# Altium PCB EasyPay.PcbDoc (part 1 of 2)
Units mil, origin at the board's own origin, x right, y up, seen from the top; angles counter-clockwise.
Board outline 5100 x 8140 mil, 2 copper layers (Top Layer, Bottom Layer); 127 components, 95 nets, 472 pads, 94 vias.
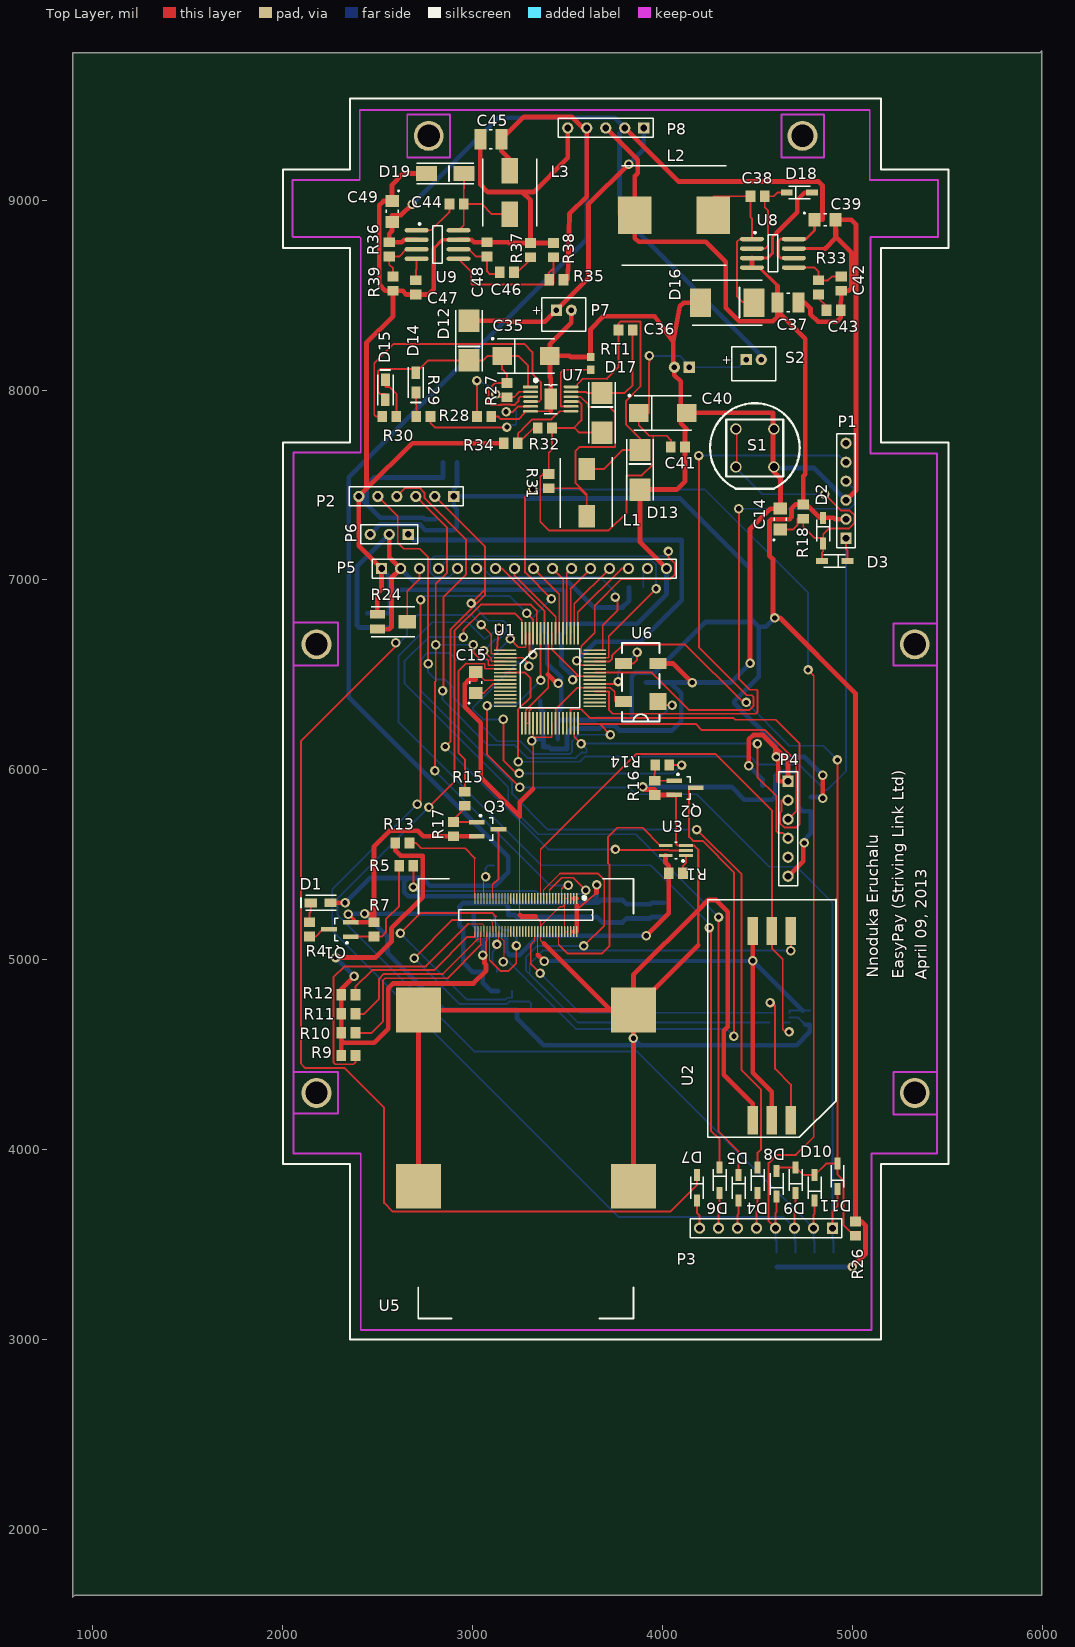
[diagram p0: Top Layer view]
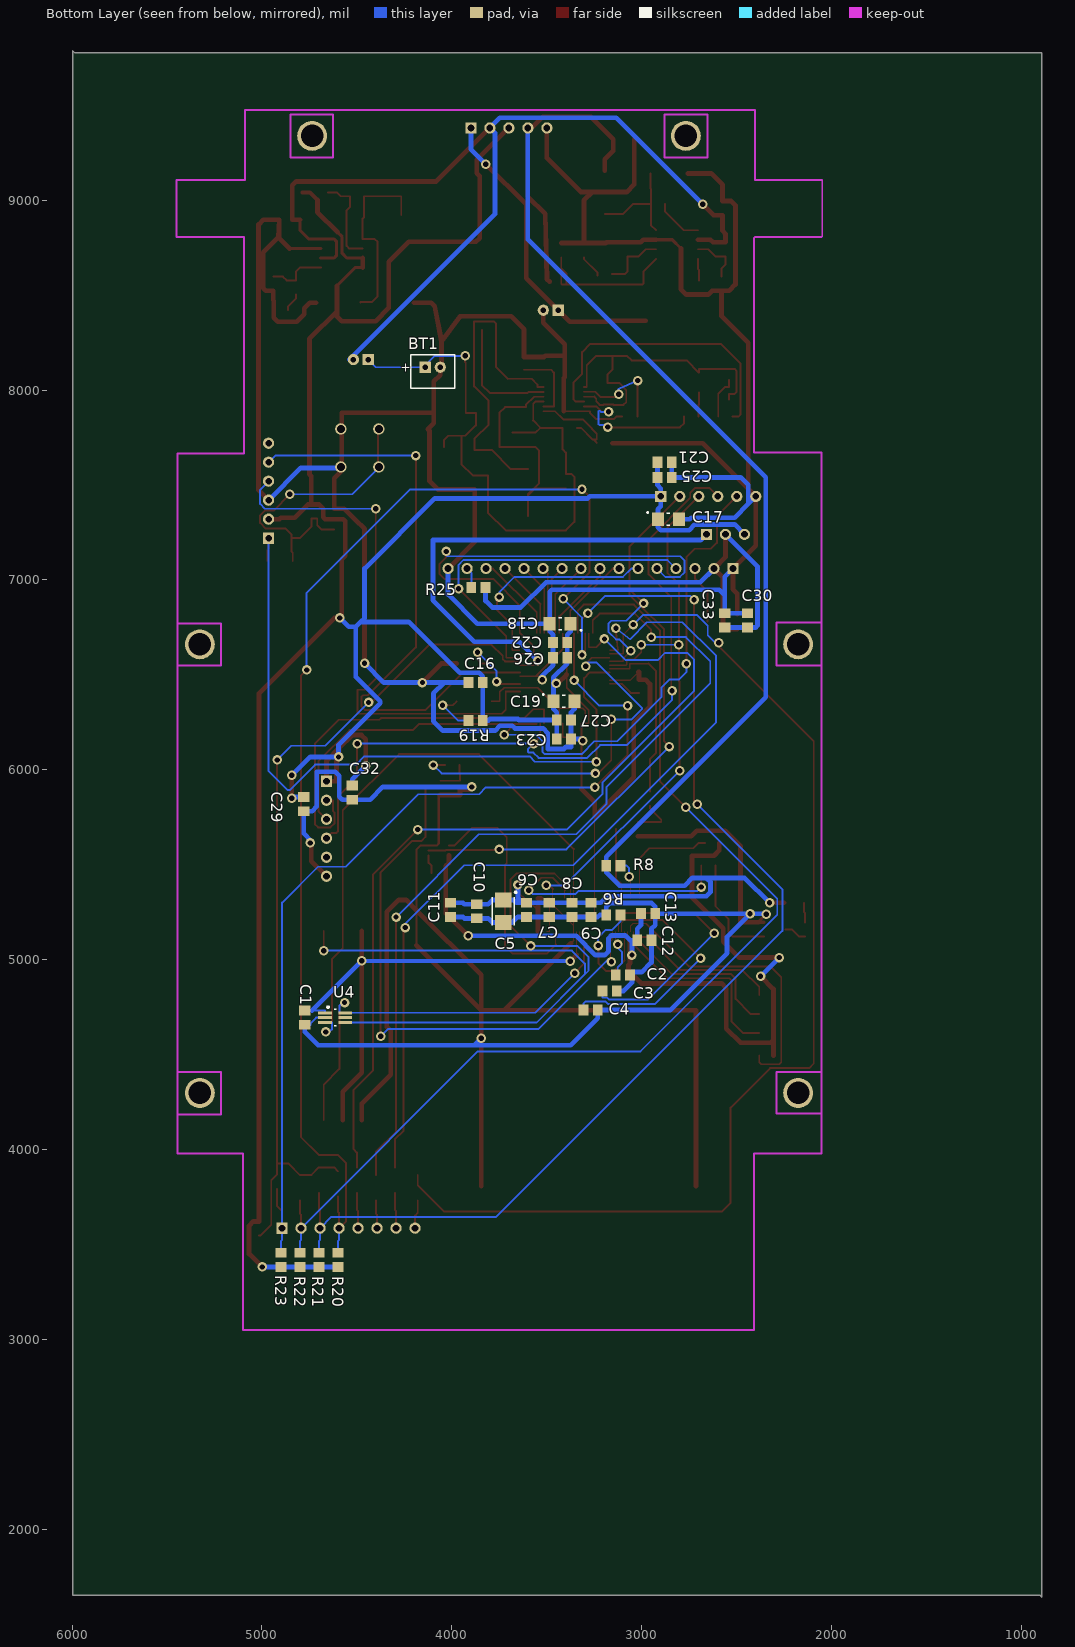
[diagram p1: Bottom Layer view, seen from below]

## Layer stack, top to bottom
Top Layer: signal copper 1.4
Dielectric: dielectric 12.6, FR-4, Dk 4.8
Bottom Layer: signal copper 1.4

## Board outline
895,9775 5985,9775 5995,9785 5995,1655 905,1655 895,1645

## Design rules (kind name [scope] priority, off if disabled: settings)
Clearance [All] p1: gap=8
HoleSize [All] p1: absolutevalues=TRUE maxlimit=120 minlimit=1 maxpercent=80.000 minpercent=20.000
MinimumSolderMaskSliver [All] p1: minsoldermaskwidth=0.1
PolygonConnect [All] p1: connectstyle=Relief reliefconductorwidth=10 reliefentries=4 polygonreliefangle="90 Angle"
RoomDefinition power [InComponentClass('power')] p1: confinementstyle=ConfineIn formatcopy=TRUE lockcomponents=FALSE outline 2482.01,7815.47 2482.01,7904.53 2486.06,7904.53 2486.06,8120 2515.47,8120 2515.47,8817.99 2524.57,8817.99 2524.57,9066.81 2686.46,9066.81 2686.46,9208.94 2993.39,9208.94 2993.39,9388.15 3436.06,9388.15 3436.06,9443.94 3963.94,9443.94 3963.94,9195.75 4370.27,9195.75 4370.27,9087.4 4833.43,9087.4 4833.43,8948.94 4956.1,8948.94 4956.1,8637.99 4984.53,8637.99 4984.53,8482.01 4977.99,8482.01 4977.99,8375.47 4609.45,8375.47 4609.45,8035.83 4285.91,8035.83 4285.91,7995.83 4192.17,7995.83 4192.17,7775.51 4157.99,7775.51 4157.99,7655.47 3963.94,7655.47 3963.94,7401.61 3748.94,7401.61 3748.94,7261.06 3446.06,7261.06 3446.06,7442.01 3355.47,7442.01 3355.47,7675.47 3122.01,7675.47 3122.01,7815.47
RoomDefinition peripherals [InComponentClass('peripherals')] p2: confinementstyle=ConfineIn formatcopy=TRUE lockcomponents=FALSE outline 2396.06,7176.06 2396.06,7303.94 2723.94,7303.94 2723.94,7123.94 4083.94,7123.94 4723.94,7123.94 4723.94,6003.94 4723.94,5897.99 4824.53,5897.99 4824.53,3973.43 4967.4,3973.43 4967.4,3662.99 5059.53,3662.99 5059.53,3507.01 4944.53,3507.01 4944.53,3342.01 4555.47,3342.01 4555.47,3523.07 4130,3523.07 4130,6686.06 2442.95,6686.06 2442.95,6709.02 2399.41,6709.02 2399.41,7176.06
RoomDefinition mcu [InComponentClass('mcu')] p3: confinementstyle=ConfineIn formatcopy=TRUE lockcomponents=FALSE outline 2336.06,7376.06 2336.06,7503.94 2802.01,7503.94 2802.01,7664.53 4233.15,7664.53 4233.15,7946.85 4736.85,7946.85 4736.85,7783.94 5028.94,7783.94 5028.94,7156.06 5018.43,7156.06 5018.43,7052.6 4035.28,7052.6 4035.28,6238.7 3952.99,6238.7 3952.99,6215.47 3716.5,6215.47 3716.5,6172.09 3487.99,6172.09 3487.99,6117.81 3332.01,6117.81 3332.01,6172.09 3095.94,6172.09 3095.94,6333.19 2962.13,6333.19 2962.13,7269.57 2758.39,7269.57 2758.39,7376.06
RoomDefinition data [InComponentClass('data')] p4: confinementstyle=ConfineIn formatcopy=TRUE lockcomponents=FALSE outline 2080,5246.06 2080,5353.94 2551.53,5353.94 2551.53,5660 2853.43,5660 2853.43,5765.87 2913.43,5765.87 2913.43,5925.87 3912.95,5925.87 3912.95,5983.47 3919.49,5983.47 3919.49,6070 4075.47,6070 4075.47,5996.18 4230.9,5996.18 4230.9,5331.89 4928.11,5331.89 4928.11,4050.47 3978.9,4050.47 3978.9,3095.47 2581.69,3095.47 2581.69,4450.94 2266.53,4450.94 2266.53,5069.29 2186.58,5069.29 2186.58,5082.01 2095.47,5082.01 2095.47,5246.06
RoutingVias [All] p1: holewidth=28 width=50 viastyle="Through Hole" minholewidth=28 minwidth=50 maxholewidth=28 maxwidth=50
SMDNeckDown [All] p1: percent=800.000
SilkscreenOverComponentPads [All] p1: minsilkscreentomaskgap=10
SolderMaskExpansion [All] p1: expansion=5
TestPointUsage [All] p1: valid=0 allowmultiple=FALSE
Testpoint [All] p1: side=15 testpointundercomponent=TRUE minsize=40 maxsize=100 preferedsize=60 minholesize=0 maxholesize=40 preferedholesize=32 testpointgrid=1 style=1023 order=0-112345678
Width Power_Width [(InNet('VBATT') OR InNet('VCC') OR InNet('VCC38') OR InNet('VCCLCD') OR InNet('VCCLCD_PIC') OR InNet('VCHARGE') OR InNet('VDDCORE') OR InNet('VREG_AUX') OR InNet('V_USIM') OR InNet('GND'))] p1: maxlimit=100 minlimit=6 preferedwidth=25
Width [All] p2: maxlimit=10 minlimit=6 preferedwidth=10
21 further rules are at their usual default settings.

## Classes and differential pairs
component class power: BT1 C35 C36 C37 C38 C39 C40 C41 C42 C43 C44 C45 C46 C47 C48 C49 D12 D13 D14 D15 D16 D17 D18 D19 L1 L2 L3 P7 P8 R27 R28 R29 R30 R31 R32 R33 R34 R35 R36 R37 R38 R39 RT1 S2 U7 U8 U9
component class peripherals: C29 C30 C32 C33 D4 D5 D6 D7 D8 D9 D10 D11 P3 P4 P5 P6 R20 R21 R22 R23 R24 R25 R26
component class mcu: C14 C15 C16 C17 C18 C19 C21 C22 C23 C25 C26 C27 D2 D3 P1 P2 R18 R19 S1 U1 U6
component class data: C1 C2 C3 C4 C5 C6 C7 C8 C9 C10 C11 C12 C13 D1 Q1 Q2 Q3 R1 R4 R5 R6 R7 R8 R9 R10 R11 R12 R13 R14 R15 R16 R17 U2 U3 U4 U5

## Components (designator, comment, footprint, x,y, rotation, side; value= is the part's Value field where it differs from the comment)
BT1 "Battery" "JST PH" 4140,8120 r180 bottom
C1 "C2012X7R1H224K" 2012[0805] 4774.53,4695.47 r90 bottom
C2 "C2012X7R1H104K/0.85" 2012[0805] 3100,4920 r180 bottom
C3 "C2012X7R1H104K/0.85" 2012[0805] 3169.53,4835.47 r180 bottom
C4 "C2012X7R1H104K/0.85" 2012[0805] 3269.53,4735.47 r180 bottom
C5 "T520B107M004ATE070" TC3528-1411 3729.53,5255.47 r270 bottom
C6 "C2012X7R1H104K/0.85" 2012[0805] 3607.01,5263.07 r90 bottom
C7 "C2012X7R1H104K/0.85" 2012[0805] 3487.01,5263.07 r90 bottom
C8 "C2012X7R1H104K/0.85" 2012[0805] 3367.01,5263.07 r90 bottom
C9 "C2012X7R1H104K/0.85" 2012[0805] 3267.01,5263.07 r90 bottom
C10 "C2012X7R1H104K/0.85" 2012[0805] 3869.53,5255.47 r90 bottom
C11 "C2012X7R1H104K/0.85" 2012[0805] 4007.01,5263.07 r90 bottom
C12 "C2012X7R1H104K/0.85" 2012[0805] 2987.01,5103.07 r0 bottom
C13 "C2012X7R2E103K" 2012[0805] 2967.01,5243.07 r0 bottom
C14 "T520A106M010ATE080" 3216[1206] 4620,7320 r90 top
C15 "T520A106M010ATE080" 3216[1206] 3015,6460 r90 top
C16 "C2012X7R1H104K/0.85" 2012[0805] 3875,6460 r180 bottom
C17 "T520A106M010ATE080" 3216[1206] 2860,7320 r180 bottom
C18 "T520A106M010ATE080" 3216[1206] 3430,6770 r0 bottom
C19 "T520A106M010ATE080" 3216[1206] 3410,6362.34 r180 bottom
C21 "C2012X7R1H104K/0.85" 2012[0805] 2880,7620 r0 bottom
C22 "C2012X7R1H104K/0.85" 2012[0805] 3430,6670 r180 bottom
C23 "C2012X7R1H104K/0.85" 2012[0805] 3410,6162.34 r0 bottom
C25 "C2012X7R2E103K" 2012[0805] 2880,7540 r0 bottom
C26 "C2012X7R2E103K" 2012[0805] 3430,6590 r180 bottom
C27 "C2012X7R2E103K" 2012[0805] 3410,6262.34 r0 bottom
C29 "C2012X7R1H104K/0.85" 2012[0805] 4780,5820 r90 bottom
C30 "C2012X7R1H104K/0.85" 2012[0805] 2443.94,6787.01 r270 bottom
C32 "C2012X7R2E103K" 2012[0805] 4525,5880 r90 bottom
C33 "C2012X7R2E103K" 2012[0805] 2563.94,6787.01 r270 bottom
C35 "TR3D106K035C0125" TC7343-2917 3280,8180 r0 top
C36 "C2012Y5V1H105Z/0.85" 2012[0805] 3804.49,8316.06 r180 top
C37 "GRM32ER60J107ME20L" 3225[1210] 4660,8460 r180 top
C38 "CGJ4J2X7R0J474K" 2012[0805] 4500,9020 r180 top
C39 "GRM31CR71E475K" 3216[1206] 4854.49,8896.06 r0 top
C40 "T495D107K010ZTE100" TC7343-2917 4000,7880 r0 top
C41 "GRM21BR71A106KE51L" 2012[0805] 4080,7700 r180 top
C42 "C0805C151J5GACTU" 2012[0805] 4940,8560 r90 top
C43 "C0805C333J3RACTU" 2012[0805] 4900,8420 r180 top
C44 "C2012X7R1H104K/0.85" 2012[0805] 2915,8980 r0 top
C45 "GRM32ER60J107ME20L" 3225[1210] 3095,9320 r0 top
C46 "C2012C0G1H332J/1.25" 2012[0805] 3180,8620 r180 top
C47 "C2012C0G1H153J" 2012[0805] 2700,8540 r90 top
C48 "C0805C680J5GACTU" 2012[0805] 3075,8740 r270 top
C49 "C3216X5R1C106KT" 3216[1206] 2575,8940 r270 top
D1 "LTST-C171GKT" LTST-C17X 2200,5300 r180 top
D2 "1N4148" SOD123 4845,7260 r90 top
D3 "1N4148" SOD123 4905,7100 r0 top
D4 "1N4148" SOD123 4500,3840 r90 top
D5 "1N4148" SOD123 4400,3800 r90 top
D6 "1N4148" SOD123 4300,3840 r90 top
D7 "1N4148" SOD123 4180,3800 r90 top
D8 "1N4148" SOD123 4600,3820 r270 top
D9 "1N4148" SOD123 4700,3840 r270 top
D10 "1N4148" SOD123 4800,3800 r270 top
D11 "1N4148" SOD123 4920,3860 r270 top
D12 "CDBA340L-G" "SMA DO-214AC" 2980,8260 r270 top
D13 "CDBA340L-G" "SMA DO-214AC" 3880,7580 r90 top
D14 "LTST-C170KRKT" LTST-C17X 2700,8040 r270 top
D15 "LTST-C171GKT" LTST-C17X 2540,8000 r90 top
D16 "MBRS330T3G" "SMC DO-214AB" 4340,8460 r0 top
D17 "CDBA340L-G" "SMA DO-214AC" 3680,7880 r90 top
D18 "BAT54T1G" SOD123 4720,9040 r180 top
D19 "RSX501L-20" RSX501L-20 2855,9140 r0 top
L1 "SLF7055T-150M2R1-3PF" SLF7055 3600,7460 r270 top
L2 "7443551131" 7443551131 4060,8920 r0 top
L3 "744314650" 744314650 3195,9040 r90 top
P1 "ICSP CONNECTOR HEADER" HDR1X6 4965,7220 r90 top
P2 "Serial Header" HDR1X6 2900,7440 r180 top
P3 "KEYPAD HEADER" HDR1X8 4893.94,3587.01 r180 top
P4 "SL032 RECEPTACLE" HDR1X6 4660,5940 r270 top
P5 "LCD RECEPTACLE" HDR1X16 2520,7060 r0 top
P6 "LCD POWER SELECTOR HEADER" HDR1X3 2660,7240 r180 top
P7 "EXTERNAL POWER HEADER" "JST PH" 3440,8420 r0 top
P8 "Power Header" HDR1X5 3900,9380 r180 top
Q1 "BC847B-TP" SOT23-3N 2300,5160 r180 top
Q2 "BC847B-TP" SOT23-3N 4117.48,5905.47 r0 top
Q3 "BC847B-TP" SOT23-3N 3077.95,5687.87 r0 top
R1 "ERJ-6GEYJ103V" 2012[0805] 4069.53,5455.47 r180 top
R4 "ERJ-6GEYJ301V" 2012[0805] 2140,5160 r270 top
R5 "ERJ-6GEYJ103V" 2012[0805] 2649.53,5495.47 r0 top
R6 "ERJ-6GEYJ103V" 2012[0805] 3149.53,5235.47 r0 bottom
R7 "ERJ-6GEYJ103V" 2012[0805] 2480,5160 r270 top
R8 "ERJ-6GEYJ103V" 2012[0805] 3149.53,5495.47 r180 bottom
R9 "ERJ-6GEYJ103V" 2012[0805] 2344.53,4495.47 r180 top
R10 "ERJ-6GEYJ103V" 2012[0805] 2344.53,4615.47 r180 top
R11 "ERJ-6GEYJ103V" 2012[0805] 2344.53,4715.47 r180 top
R12 "ERJ-6GEYJ103V" 2012[0805] 2344.53,4815.47 r180 top
R13 "ERJ-6GEYJ103V" 2012[0805] 2629.53,5615.47 r0 top
R14 "ERJ-6GEYJ103V" 2012[0805] 3997.48,6025.47 r0 top
R15 "ERJ-6GEYJ103V" 2012[0805] 2957.95,5847.87 r90 top
R16 "ERJ-6GEYJ473V" 2012[0805] 3957.48,5905.47 r90 top
R17 "ERJ-6GEYJ473V" 2012[0805] 2897.95,5687.87 r90 top
R18 "ERJ-6GEYJ103V" 2012[0805] 4740,7360 r270 top
R19 "ERJ-6GEYJ103V" 2012[0805] 3875,6260 r0 bottom
R20 "ERJ-6GEYJ103V" 2012[0805] 4600,3420 r90 bottom
R21 "ERJ-6GEYJ103V" 2012[0805] 4700,3420 r90 bottom
R22 "ERJ-6GEYJ103V" 2012[0805] 4800,3420 r90 bottom
R23 "ERJ-6GEYJ103V" 2012[0805] 4900,3420 r90 bottom
R24 "TC33X-2-103E" TC33 2580,6780 r270 top
R25 "ERJ-6GEYJ200V" 2012[0805] 3860,6960 r0 bottom
R26 "ERJ-6GEYJ103V" 2012[0805] 5015,3585 r270 top
R27 "ERJ-6GEYJ204V" 2012[0805] 3180,8000 r270 top
R28 "ERJ-6GEYJ104V" 2012[0805] 3060,7860 r0 top
R29 "ERJ-6GEYJ512V" 2012[0805] 2740,7860 r0 top
R30 "ERJ-6GEYJ512V" 2012[0805] 2560,7860 r180 top
R31 "ERJ-L06KF10CV" 2012[0805] 3400,7520 r270 top
R32 "ERJ-6ENF5363V" 2012[0805] 3380,7800 r180 top
R33 "ERJ-6ENF2611V" 2012[0805] 4820,8540 r270 top
R34 "ERJ-6GEYJ474V" 2012[0805] 3200,7720 r180 top
R35 "ERJ-6ENF1002V" 2012[0805] 3440,8580 r180 top
R36 "ERJ-6ENF3483V" 2012[0805] 2560,8740 r270 top
R37 "ERJ-6ENF2212V" 2012[0805] 3304.49,8736.06 r90 top
R38 "ERJ-6ENF2611V" 2012[0805] 3424.49,8736.06 r90 top
R39 "ERJ-6ENF1023V" 2012[0805] 2580,8560 r270 top
RT1 "NCP18XH103F03RB" 1608[0603] 3620,8140 r90 top
S1 "D6C00 F2 LFS" D6C 4500,7700 r270 top
S2 "SYSTEM POWER SWITCH" "JST PH" 4440,8160 r0 top
U1 "PIC18F67K22-I/PT" TQFP-PT64_N 3170,6630 r0 top
U2 "7111S2015X02LF" 7111S2015X02LF 4474.53,4155.47 r90 top
U3 "SN74LVC1G126DCKR" SOT353-5N 4069.53,5575.47 r180 top
U4 "SMF05CT1G" SOT363-6N 4614.53,4695.47 r180 bottom
U5 "SIM5218A" "SIM5218A v2" 3547.01,5323.07 r270 top
U6 "SG-636PCE 18.4320MC0" SG-636PCE 3975,6360 r90 top
U7 "LT3652" LT3652MSE 3324.49,8016.06 r0 top
U8 "ADP3050ARZ-3.3" SOIC127P600-8N 4580,8720 r0 top
U9 "TPS54331D" SOIC127P600-8N 2814.49,8766.06 r0 top

## Footprints (in the part's own frame and the unit in brackets; to place one, negate y for a bottom-side part, rotate by r counter-clockwise, add the part's x,y. Pads: shape width x height; smd on the part's side, far side on the other; paste and mask are expansions set on the pad)
1608[0603] [mm] "Chip Capacitor; Body 1.6 x 0.8 mm (LxW typ)"
  rect 1.1x1 smd: 1(-0.85,0) 2(0.85,0)
2012[0805] [mm] "Chip Resistor; Body 2.0 x 1.3 mm (LxW typ)"
  rect 1.3x1.5 smd: 1(-0.95,0) 2(0.95,0)
3216[1206] [mm] "Chip Resistor; Body 3.2 x 1.6 mm (LxW typ)"
  rect 1.6x1.8 smd: 1(-1.4,0) 2(1.4,0)
  silkscreen extent -2.87,-0.8 0.2,0.99
3225[1210] [mm] "Chip Resistor; Body 3.2 x 2.5 mm (LxW typ)"
  rect 1.6x2.7 smd: 1(-1.4,0) 2(1.4,0)
  silkscreen extent -0.2,-1.25 0.2,1.25
7111S2015X02LF [mm]
  rect 3.8x1.4 smd: C1(25.3,0) C2(25.3,-2.54) C3(25.3,-5.08) C5(0,0) C6(0,-2.54) C7(0,-5.08)
  silkscreen extent -2.29,-11.14 29.5,6.06
744314650 [mm]
  rect 3.4x2.2 smd: 1(-2.9,0) 2(2.9,0)
  silkscreen extent -4.5,-3.6 4.5,3.6
7443551131 [mm]
  rect 4.5x5 smd: 1(-5.25,0) 2(5.25,0)
  silkscreen extent -7,-6.65 7,6.65
D6C [mil]
  round 60 hole 42: 1(-95,85) 2(-95,-115) 3(105,85) 4(105,-115)
  silkscreen extent -231,-251 220,221
HDR1X3 [mm] "Connector; Header; 3 Position"
  rect 1.5x1.5 hole 0.9: 1(0,0)
  round 1.5 hole 0.9: 2(2.54,0) 3(5.08,0)
  silkscreen extent -1.27,-1.27 6.35,1.27
HDR1X5 [mm] "Connector; Header; 5 Position"
  rect 1.5x1.5 hole 0.9: 1(0,0)
  round 1.5 hole 0.9: 2(2.54,0) 3(5.08,0) 4(7.62,0) 5(10.16,0)
  silkscreen extent -1.27,-1.27 11.43,1.27
HDR1X6 [mm] "Connector; Header; 6 Position"
  rect 1.5x1.5 hole 0.9: 1(0,0)
  round 1.5 hole 0.9: 2(2.54,0) 3(5.08,0) 4(7.62,0) 5(10.16,0) 6(12.7,0)
  silkscreen extent -1.27,-1.27 13.97,1.27
HDR1X8 [mm] "Connector; Header; 8 Position"
  rect 1.5x1.5 hole 0.9: 1(0,0)
  round 1.5 hole 0.9: 2(2.54,0) 3(5.08,0) 4(7.62,0) 5(10.16,0) 6(12.7,0) 7(15.24,0) 8(17.78,0)
  silkscreen extent -1.27,-1.27 19.05,1.27
HDR1X16 [mm] "Connector; Header; 16 Position"
  rect 1.5x1.5 hole 0.9: 1(0,0)
  round 1.5 hole 0.9: 2(2.54,0) 3(5.08,0) 4(7.62,0) 5(10.16,0) 6(12.7,0) 7(15.24,0) 8(17.78,0) 9(20.32,0) 10(22.86,0) 11(25.4,0) 12(27.94,0) 13(30.48,0) 14(33.02,0) 15(35.56,0) 16(38.1,0)
  silkscreen extent -1.27,-1.27 39.37,1.27
"JST PH" [mm] "Connector; Header; 2 Position"
  rect 1.5x1.5 hole 0.75: 1(0,0)
  round 1.5 hole 0.75: 2(2,0)
  silkscreen extent -1.95,-2.8 3.95,1.7
LT3652MSE [mm]
  rect 2x0.35 smd: 1(-0.5,0)
  oval 2x0.35 smd: 2(-0.5,-0.65) 3(-0.5,-1.3) 4(-0.5,-1.95) 5(-0.5,-2.6) 6(-0.5,-3.25) 7(4.9,-3.25) 8(4.9,-2.6) 9(4.9,-1.95) 10(4.9,-1.3) 11(4.9,-0.65) 12(4.9,0)
  rect 1.651x2.845 smd: 13(2.2,-1.625)
  silkscreen extent -0.02,-3.58 3.07,1.09
LTST-C17X [mm]
  rect 1.65x1.15 smd: 1(-1.3,0)
  rect 1.65x1.2 smd: 2(1.35,0)
  silkscreen extent -2.03,-1.02 2.67,1.02
RSX501L-20 [mm]
  rect 2.8x2 smd: 1(-2.5,0) 2(2.5,0)
  silkscreen extent -3.81,-1.4 3.81,1.4
SG-636PCE [mm]
  rect 2.3x2.3 smd: 1(0,0)
  rect 1.5x2.3 smd: 2(5.08,0) 3(5.08,4.6) 4(0,4.6)
  silkscreen extent -2.7,-0.2 7.8,4.8
"SIM5218A v2" [mm]
  rect 1.45x0.17 smd: 1(0,0)
  oval 1.45x0.17 smd: 2(0,-0.4) 3(0,-0.8) 4(0,-1.2) 5(0,-1.6) 6(0,-2) 7(0,-2.4) 8(0,-2.8) 9(0,-3.2) 10(0,-3.6) 11(0,-4) 12(0,-4.4) 13(0,-4.8) 14(0,-5.2) 15(0,-5.6) 16(0,-6) 17(0,-6.4) 18(0,-6.8) 19(0,-7.2) 20(0,-7.6) 21(0,-8) 22(0,-8.4) 23(0,-8.8) 24(0,-9.2) 25(0,-9.6) 26(0,-10) 27(0,-10.4) 28(0,-10.8) 29(0,-11.2) 30(0,-11.6) 31(0,-12) 32(0,-12.4) 33(0,-12.8) 34(0,-13.2) 35(0,-13.6) 36(4.425,-13.6) 37(4.425,-13.2) 38(4.425,-12.8) 39(4.425,-12.4) 40(4.425,-12) 41(4.425,-11.6) 42(4.425,-11.2) 43(4.425,-10.8) 44(4.425,-10.4) 45(4.425,-10) 46(4.425,-9.6) 47(4.425,-9.2) 48(4.425,-8.8) 49(4.425,-8.4) 50(4.425,-8) 51(4.425,-7.6) 52(4.425,-7.2) 53(4.425,-6.8) 54(4.425,-6.4) 55(4.425,-6) 56(4.425,-5.6) 57(4.425,-5.2) 58(4.425,-4.8) 59(4.425,-4.4) 60(4.425,-4) 61(4.425,-3.6) 62(4.425,-3.2) 63(4.425,-2.8) 64(4.425,-2.4) 65(4.425,-2) 66(4.425,-1.6) 67(4.425,-1.2) 68(4.425,-0.8) 69(4.425,-0.4) 70(4.425,0)
  rect 6x6 smd: 71(14.942,-21.138) 72(38.492,-21.138) 73(38.492,7.589) 74(14.942,7.589)
  silkscreen extent -2.64,-21.19 56.2,7.62
SLF7055 [mm]
  rect 3x2.2 smd: 1(-3.15,0) 2(3.15,0)
  silkscreen extent -4.7,-3.56 4.7,3.43
"SMA DO-214AC" [mm]
  rect 3x2.79 smd: 1(-2.65,0) 2(2.65,0)
  silkscreen extent -4.06,-1.78 4.06,1.78
"SMC DO-214AB" [mil]
  rect 110x150 smd: 1(-140.49,0) 2(140.49,0)
  silkscreen extent -185,-118 185,118
SOD123 [mm] "SOD-123; 2 Leads; Body 2.7 x 1.6 mm, (LxW)"
  rect 1.6x0.8 smd: 1(-1.7,0) 2(1.7,0)
  silkscreen extent -1.45,-0.85 1.45,0.85
SOIC127P600-8N [mm] "SOIC, 8-Leads, Body 4.9x3.9mm, Pitch 1.27mm, IPC Medium Density"
  oval 3.2x0.6 smd: 1(-2.8,1.905) 2(-2.8,0.635) 3(-2.8,-0.635) 4(-2.8,-1.905) 5(2.8,-1.905) 6(2.8,-0.635) 7(2.8,0.635) 8(2.8,1.905)
  silkscreen extent -2.52,-2.5 0.64,2.88, body extent -2,-2.5 2,2.5, height 1.75
SOT23-3N [mm] "SOT23, 3-Leads, Body 2.9x1.3mm, Pitch 0.95mm, Lead Span 2.5mm, IPC Medium Density"
  rect 2.1x0.6 smd: 1(-1.45,0.95) 2(-1.45,-0.95) 3(1.45,0)
  silkscreen extent -1.07,-1.5 0.7,1.92, body extent -0.7,-1.5 0.7,1.5, height 1.1
SOT353-5N [mm] "SOT353, 5-Leads, Body 2x1.3mm, Pitch 0.65mm, Lead Span 2.1mm, IPC Medium Density"
  rect 1.85x0.4 smd: 1(-1.35,0.65) 2(-1.35,0) 3(-1.35,-0.65) 4(1.35,-0.65) 5(1.35,0.65)
  silkscreen extent -1.07,-1.1 0.15,1.52, body extent -0.7,-1.1 0.7,1.1, height 1.1
SOT363-6N [mm] "SOT363, 6-Leads, Body 2x1.3mm, Pitch 0.65mm, Lead Span 2.1mm, IPC Medium Density"
  rect 1.85x0.4 smd: 1(-1.35,0.65) 2(-1.35,0) 3(-1.35,-0.65) 4(1.35,-0.65) 5(1.35,0) 6(1.35,0.65)
  silkscreen extent -1.07,-1.1 0.15,1.52, body extent -0.7,-1.1 0.7,1.1, height 1
TC33 [mm]
  rect 1.2x2 smd: 1(-1,-2.1) 2(1,-2.1)
  rect 1.8x2.4 smd: 3(0,1.9)
  silkscreen extent -2.03,-2.92 2.03,2.92
TC3528-1411 [mm] "Capacitor, SM Tantalum; Body 3.5 x 2.8 mm (LxW typ)"
  rect 2x2.2 smd: 1(-1.5,0) 2(1.5,0)
  silkscreen extent -2.66,-1.5 1.85,1.78
TC7343-2917 [mm] "Capacitor, SM Tantalum; Body 7.3 x 4.3 mm (LxW typ)"
  rect 2.6x2.4 smd: 1(-3.2,0) 2(3.2,0)
  silkscreen extent -4.57,-2.3 3.8,2.42
TQFP-PT64_N [mm]
  oval 3x0.24 smd: 1(0,0)
  rect 3x0.24 smd: 2(0,-0.5) 3(0,-1) 4(0,-1.5) 5(0,-2) 6(0,-2.5) 7(0,-3) 8(0,-3.5) 9(0,-4) 10(0,-4.5) 11(0,-5) 12(0,-5.5) 13(0,-6) 14(0,-6.5) 15(0,-7) 16(0,-7.5) 33(12,-7.5) 34(12,-7) 35(12,-6.5) 36(12,-6) 37(12,-5.5) 38(12,-5) 39(12,-4.5) 40(12,-4) 41(12,-3.5) 42(12,-3) 43(12,-2.5) 44(12,-2) 45(12,-1.5) 46(12,-1) 47(12,-0.5) 48(12,0)
  rect 0.24x3 smd: 17(2.25,-9.75) 18(2.75,-9.75) 19(3.25,-9.75) 20(3.75,-9.75) 21(4.25,-9.75) 22(4.75,-9.75) 23(5.25,-9.75) 24(5.75,-9.75) 25(6.25,-9.75) 26(6.75,-9.75) 27(7.25,-9.75) 28(7.75,-9.75) 29(8.25,-9.75) 30(8.75,-9.75) 31(9.25,-9.75) 32(9.75,-9.75) 49(9.75,2.25) 50(9.25,2.25) 51(8.75,2.25) 52(8.25,2.25) 53(7.75,2.25) 54(7.25,2.25) 55(6.75,2.25) 56(6.25,2.25) 57(5.75,2.25) 58(5.25,2.25) 59(4.75,2.25) 60(4.25,2.25) 61(3.75,2.25) 62(3.25,2.25) 63(2.75,2.25) 64(2.25,2.25)
  silkscreen extent 2.03,-7.71 9.96,0.22

## Part data
BT1: "Multicell Battery"
C1 C2 C3 C4 C6 C7 C8 C9 C10 C11 C12 C13 C16 C21 C22 C23 C25 C26 C27 C29 C30 C32 C33 C36 C37 C38 C41 C42 C43 C44 C45 C46 C47 C48 C49: library part C0805, "Ceramic Chip Capacitor - Standard"
C5 C14 C15 C17 C18 C19 C35 C39 C40: library part "Cap Pol1", "Polarized Capacitor (Radial)"
D1 D14 D15: library part LED2, "Typical RED, GREEN, YELLOW, AMBER GaAs LED"
D2 D3 D4 D5 D6 D7 D8 D9 D10 D11: library part "Diode 1N4148", "High Conductance Fast Diode"
D12 D13 D16 D17: library part 30BQ040, "Schottky Rectifier"
D18: library part "Diode 11DQ03", "Schottky Rectifier"
D19: library part Diode, "Default Diode"
L1 L2 L3: library part "Inductor Iron", "Magnetic-Core Inductor"
P1 P2 P4: library part "Header 6", "Header, 6-Pin"
P3: library part "Header 8", "Header, 8-Pin"
P5: library part "Header 16", "Header, 16-Pin"
P6: library part "Header 3", "Header, 3-Pin"
P7: library part "Header 2", "Header, 2-Pin"
P8: library part "Header 5", "Header, 5-Pin"
Q1 Q2 Q3: library part NPN, "NPN Bipolar Transistor"
R1 R4 R5 R6 R7 R8 R9 R10 R11 R12 R13 R14 R15 R16 R17 R18 R19 R20 R21 R22 R23 R25 R26 R27 R28 R29 R30 R31 R32 R33 R34 R35 R36 R37 R38 R39: library part Res1, "Resistor"
R24: library part RPot, "Potentiometer"
RT1: library part "Res Thermal", "Thermistor"
S1: library part D6C
S2: library part SW-PB, "Switch"
U1: library part PIC18F6722-I/PT, "1-Mbit, Enhanced Flash Microcontroller with 10-Bit A/D and nanoWatt Technology, 128K Flash, 64-Pin TQFP, Industrial Temperature Range"
U3: library part SN74LVC1G126
U4: library part SMF05C
U6: library part SG636PCE

## Free pads (board coordinates)
  round 157.48 hole 118.11: 1(2768,9338) 2(4736,9338) 3(2177,6661) 6(5327,6661) 7(2177,4299) 8(5327,4299)

## Via types
v1: diameter 50, hole 28, Top Layer to Bottom Layer, 94 vias

## Nets (pads, with @x,y where several pads share a name; then routed paths per layer and width w, separated by ;. In a path a pad name is that pad's centre, name@x,y a point inside that pad or via, vN(x,y) a via of type N, cw(c..) or ccw(c..) an arc to the next point about the centre after c; other vN are vias at no path point)
DATALED: R5.2 U5.10 | length 1332
  Top Layer w6: U5.10@3405.28,5323.07 3405.28,5368.28
  Top Layer w10: v1(2686.93,5383) R5.2@2686.93,5495.47 ; 3405.28,5368.28 3469,5432 3530,5432 v1(3595,5367)
  Bottom Layer w10: v1(2686.93,5383) 2707.93,5362 3334,5362 3349,5347 3575,5347 v1(3595,5367)
DATAPOWER: Q2.3 U5.45 | length 3024.3
  Top Layer w6: U5.45@3153.31,5148.86 3153.31,5109.57 3164.45,5098.43 3164.45,4994.45 v1(3160,4990)
  Top Layer w10: Q2.3@4174.57,5905.47 4139,5905.47 4139,5647 4160,5626 4210,5626 4375,5461 v1(4375,4598)
  Bottom Layer w10: v1(3160,4990) 3160,4995.55 3164.45,5000 3180,5000 3545,4635 4338,4635 v1(4375,4598)
DATAPOWER_PIC: R14.2 U1.3 | length 2017.2
  Top Layer w6.61: U1.3@3170,6590.63 3264,6590.63
  Top Layer w7: 3264,6590.63 3295,6559.63 3295,6545.71 3295,6545 v1(3295.71,6545.71)
  Top Layer w10: v1(3161,6266) 3161,6050 3230,5981 v1(3244,5981) ; R14.2@4034.88,6025.47 v1(4099,6025.47)
  Bottom Layer w10: v1(3161,6266) 3054,6266 3000,6320 3000,6326.63 3238,6564.63 3285.37,6564.63 3295,6555 3295,6545.71 3295,6545 v1(3295.71,6545.71) ; v1(3244,5981) 4054.53,5981 v1(4099,6025.47)
DATARESET: Q3.3 U5.29 | length 378.2
  Top Layer w6: U5.29@3106.06,5323.07 3106.06,5397.94
  Top Layer w10: 3106.06,5397.94 3136,5427.88 3136,5687.87 Q3.3@3135.04,5687.87
DATARESET_PIC: R15.2 U1.6 | length 939.4
  Top Layer w8: 2964,6560 3064,6560 3064,6531.58 U1.6@3170,6531.58
  Top Layer w10: R15.2@2957.95,5885.28 2957.95,6056.05 2924.5,6089.5 2924.5,6520.5 2964,6560
DATARX: P2.2 U1.4 U3.2 | length 3689.3
  Top Layer w8: v1(3058,6627) 3080,6605 3080,6603.7 3097.23,6586.47 3097.23,6570.95 U1.4@3170,6570.95
  Top Layer w10: P2.2@2800,7440 3065,7175 3065,6950 ; v1(2855,6123) 2883,6151 2883,6740 3005,6862 3065,6922 3065,6950 ; v1(2991,6876) 3065,6950 ; v1(3751,5581) 3754,5578 4031,5578 4033.53,5575.47 U3.2@4122.68,5575.47
  Bottom Layer w10: v1(2855,6123) 3397,5581 v1(3751,5581) ; v1(2991,6876) 3082,6785 3161,6785 3176,6770 3176,6727 3136,6687 3118,6687 v1(3058,6627)
DATARX_CONV: U3.4 U5.64 | length 1313.7
  Top Layer w6: 3452.52,5080 U5.64@3452.52,5148.86
  Top Layer w10: 3452.52,5080 3499.52,5033 3680,5033 3720,5073 3720,5500 3711,5509 3711,5646 3760,5695 3894.06,5695 3988,5601.06 U3.4@4016.38,5601.06
DATATX: P2.3 U1.5 U5.6 | length 3030.7
  Top Layer w6: U5.6@3468.27,5323.07 3468.27,5373.27
  Top Layer w8: 3040,6581.38 3076.32,6581.38 3080.62,6577.08 3080.62,6554 3083.36,6551.26 U1.5@3170,6551.26
  Top Layer w10: P2.3@2700,7440 2865,7275 2865,7039 2805,6979 v1(2805,6659) 2805,6467 2801,6463 v1(2801,5996) ; v1(3003,6659) 3003,6618.38 3040,6581.38 ; 3468.27,5373.27 3487,5392 v1(3503,5392)
  Bottom Layer w10: v1(2801,5996) 3405,5392 v1(3503,5392) ; v1(2805,6659) v1(3003,6659)
GND: BT1.2 C1.1 C2.2 C3.2 C4.2 C5.2 C6.1 C7.1 C8.1 C9.1 C10.1 C11.1 C12.1 C13.1 C14.2 C15.2 C16.1 C17.2 C18.2 C19.2 C21.1 C22.1 C23.1 C25.1 C26.1 C27.1 C29.1 C30.1 C32.1 C33.1 C35.2 C37.1 C39.2 C40.2 C41.1 C42.1 C43.1 C45.1 C47.1 C48.1 C49.1 D13.1 D16.1 D19.1 P1.3 P2.6 P4.6 P5.1 P5.16 P7.2 P8.5 Q1.2 Q2.2 Q3.2 R6.2 R7.1 R16.1 R17.1 R24.1 R28.2 R34.2 R37.2 R38.2 R39.2 RT1.2 S1.1 S1.3 U1.9 U1.20 U1.25 U1.41 U1.56 U2.C5 U3.3 U4.2 U5.4 U5.5 U5.20 U5.58 U5.66 U5.67 U5.71 U5.72 U5.73 U5.74 U6.2 U7.6 U7.13 U8.7 U9.7 | length 40967
  Top Layer w6: 3247.8,5236 U5.20@3247.8,5323.07 3247.8,5755 ; 3358.03,5102 U5.58@3358.03,5148.86 3358.03,5180 ; 3358.03,5200 3358.03,5180 ; 3458.03,5280 3358.03,5180 ; U5.5@3484.02,5323.07 U5.5@3484.02,5323 ; U5.67@3499.76,5148.86 3499.76,5148 3484.02,5148 U5.66@3484.02,5148.86 3484.02,5290 U5.5@3484.02,5323 ; U5.4@3499.76,5323.07 3499.76,5323 U5.5@3484.02,5323
  Top Layer w6.61: v1(3525,6475) v1@3525,6484.21 ; 3563,6492.21 U1.41@3642.44,6492.21
  Top Layer w7: U1.56@3416.06,6718.58 3416.06,6635.14 3559,6492.21 ; v1@3525,6484.21 3533,6492.21 3559,6492.21 ; 3559,6492.21 3563,6492.21 3559,6492.21
  Top Layer w8: C15.2@3017.4,6515.12 3060,6472.52 U1.9@3170,6472.52 ; U1.20@3317.64,6246.14 v1@3317.64,6173 ; 3330.03,5228 3358.03,5200 ; 3358.03,5102 3373,5087.03 ; U1.25@3416.06,6246.14 3416.06,6173 v1@3317.64,6173 ; 3458.03,5280 3474.02,5280 3484.02,5290 ; v1@3317.64,6153 3317.64,5900.66 v1@3317.64,6153 ; v1@3317.64,6153 v1@3317.64,6173
  Top Layer w9.65: R28.2@3105,7860 3135,7860 3147.82,7847.18 3241.07,7847.18 3272,7878.11 3272,7888.11 U7.6@3304.8,7888.11 3411.1,7888.11
  Top Layer w11.02: Q2.2@4069,5868.07 4069,5612.06 4080,5601.06 U3.3@4122.68,5601.06 4165.94,5601.06 4187,5580 4187,5262 4187,5075.99
  Top Layer w16.54: v1(2345,5240) 2372.34,5212.66 2384,5201 2384,5197.4 Q1.2@2357.09,5197.4 ; 2794,8745.06 2840,8791.06 U9.7@2924.72,8791.06 ; Q2.2@4060.39,5868.07 Q2.2@4069,5868.07 ; U8.7@4690.24,8745 4854.61,8745
  Top Layer w25: Q1.2@2384,5197.4 R7.1@2480,5197.4 ; v1(2430,5243) 2460,5243 R7.1@2480,5197.4 ; R24.1@2497.32,6819.37 2497.32,6928 2520,6950.68 P5.1@2520,7060 2400,7180 P2.6@2400,7440 2440,7480 ; U5.72@2714.8,3807.62 U5.71@2714.8,4734.78 3725.25,4734.78 ; D19.1@2756.57,9140 2635,9140 2575,9080 C49.1@2575,8995.12 2530,8995.12 2507,8972.12 2507,8555.6 2540,8522.6 R39.2@2580,8522.6 ; 2794,8745.06 2794,8530.6 2766,8502.6 C47.1@2700,8502.6 2650,8502.6 2630,8522.6 R39.2@2580,8522.6 ; U9.7@2924.72,8791.06 2993,8791.06 3006.66,8777.4 C48.1@3075,8777.4 3187,8777.4 3190.94,8773.46 R37.2@3304.49,8773.46 ; C15.2@3017.4,6515.12 C15.2@3015,6515.12 3015,6475 2980,6475 2957.07,6452.07 2957.07,6332.93 3042,6248 3042,5960.8 3247.8,5755 3247.8,5830.82 3317.64,5900.66 ; Q3.2@3020.87,5650.47 R17.1@2897.95,5650.47 2739.53,5650.47 2710,5680 2562,5680 2480,5598 R7.1@2480,5197.4 ; C45.1@3039.88,9320 3039.88,9082.12 3080,9042 3261,9042 ; R34.2@3155,7720 2680,7720 2440,7480 ; 3247.8,5236 3255.8,5228 3330.03,5228 ; v1(3311,6153) v1@3317.64,6153 ; 3373,5087.03 3725.25,4734.78 ; 3411.1,7888.11 U7.13@3411.1,7952.09 3411.1,8063 3405.98,8068.12 C35.2@3405.98,8180 ; R38.2@3424.49,8773.46 R37.2@3304.49,8773.46 ; P8.5@3500,9380 3500,9222 3320,9042 ; P7.2@3518.74,8400 3518.74,8353.74 3405.98,8240.98 C35.2@3405.98,8180 ; U5.73@3845.79,3807.62 v1(3845.79,4586.5) U5.74@3845.79,4734.78 ; v1(3895,5910) 3909,5896 3957.48,5896 R16.1@3957.48,5868.07 Q2.2@4060.39,5868.07 ; U6.2@3975,6560 4055,6560 v1(4155,6460) ; P5.16@4020,7060 3880,7200 D13.1@3880,7475.67 4073.07,7475.67 4117.4,7520 C41.1@4117.4,7700 4117.4,7785 4125.98,7793.58 4095,7824.57 4095,7880 4095,8045 4061.26,8078.74 BT1.2@4061.26,8120 ; BT1.2@4055,8120 4055,8256 ; C40.2@4095.98,7880 C40.2@4125.98,7880 4580,7880 4580,7795 4580,7595 4580,7575 4620,7535 C14.2@4620,7375.12 4566.88,7375.12 ; 4187,5075.99 U5.74@3845.79,4734.78 ; D16.1@4199.51,8460 4110,8460 4090,8440 4055,8256 ; v1(4460,6560.63) 4460,7268.24 4507.97,7316.21 ; U2.C5@4474.53,4155.47 4474.53,4243 4321.52,4396.01 4321.52,4625.19 4343,4646.67 4343,5252 4280,5315 4240,5315 ; P4.6@4660,5440 4740,5520 4740,5610 v1(4745,5615) ; C37.1@4715.12,8460 4749,8460 4778,8431 4778,8400 4818,8360 4917.4,8360 4937.4,8380 C43.1@4937.4,8420 4937.4,8470 4940,8472.6 C42.1@4940,8522.6 4980,8522.6 4993,8535.6 4993,8725.61 ; 4854.61,8745 4914.11,8804.5 ; P1.3@4965,7420 5018,7473 5018,8871.06 4993,8896.06 C39.2@4909.61,8896.06 ; 2440,7480 2440,8248 2580,8388 R39.2@2580,8522.6 ; 3261,9042 3320,9042 ; 3261,9042 3320,9042 ; 3261,9042 3304.49,8998.51 R37.2@3304.49,8773.46 ; C35.2@3405.98,8180 3509,8180 3515.54,8173.46 RT1.2@3620,8173.46 3620,8320 3688.09,8388.09 3957.91,8388.09 4055,8256 ; 3725.25,4734.78 U5.74@3845.79,4734.78 ; U5.74@3845.79,4734.78 3845.79,4920.79 4187,5262 ; 4187,5262 4240,5315 ; 4187,5262 4240,5315 ; 4507.97,7316.21 4566.88,7375.12 ; 4507.97,7316.21 4566.88,7375.12 ; C39.2@4909.61,8896.06 4909.61,8809 4914.11,8804.5 ; C39.2@4909.61,8896.06 4914.11,8804.5 ; 4914.11,8804.5 4993,8725.61 ; 4914.11,8804.5 4993,8725.61
  Bottom Layer w11.02: U4.2@4667.68,4695.47 4714.53,4695.47 C1.1@4751.93,4658.07
  Bottom Layer w25: v1(2345,5240) 2348.07,5243.07 2430,5243.07 C13.1@2929.61,5243.07 ; P2.6@2400,7440 2440,7400 ; v1(2430,5243) 2551.5,5121.5 2551.5,5034.04 2850.07,4735.47 C4.2@3232.13,4735.47 3232.13,4691.87 3373.81,4550.19 3845.79,4550.19 3882.1,4550.19 ; C30.1@2443.94,6824.41 C33.1@2563.94,6824.41 2563.94,6920 ; P5.1@2520,7060 2563.94,7016.06 2563.94,6920 ; C17.2@2804.88,7320 2748,7320 2740,7328 2512,7328 2440,7400 ; C21.1@2842.6,7620 C25.1@2842.6,7540 2480,7540 2440,7500 2440,7440 2440,7400 ; C3.2@3132.13,4835.47 3096.65,4835.47 3052.13,4880 3052.13,4920 3052.13,4935.47 3000,4935.47 2949.61,4985.87 C12.1@2949.61,5103.07 2949.61,5163 2929.61,5183 C13.1@2929.61,5243.07 ; v1(3311,6153) 3320.34,6162.34 C23.1@3372.6,6162.34 ; C19.2@3354.88,6362.34 3354.88,6320.72 3372.6,6303 C27.1@3372.6,6262.34 C23.1@3372.6,6162.34 ; v1(3525,6475) 3525,6494.4 3467.4,6552 C26.1@3467.4,6590 C22.1@3467.4,6670 3467.4,6711 3485.12,6728.72 C18.2@3485.12,6770 ; v1(3845.79,4586.5) 3882.1,4550.19 ; v1(3895,5910) 4363,5910 4430.4,5842.6 C32.1@4525,5842.6 4576,5842.6 4593,5859.6 4593,5968 4615.03,5990.03 4711,5990.03 4711,5807.6 4736,5782.6 C29.1@4780,5782.6 4780,5665 4740,5625 4740,5620 v1(4745,5615) ; C16.1@3912.4,6460 4040,6460 ; C11.1@4007.01,5225.67 3941.6,5225.67 3934,5218.07 C10.1@3869.53,5218.07 3809.65,5218.07 3788,5196.42 C5.2@3729.53,5196.42 3682.25,5196.42 3653,5225.67 C6.1@3607.01,5225.67 C7.1@3487.01,5225.67 C8.1@3367.01,5225.67 C9.1@3267.01,5225.67 3231.8,5225.67 3222,5235.47 R6.2@3186.93,5235.47 3186.93,5280 3167.43,5299.5 2949.11,5299.5 2929.61,5280 C13.1@2929.61,5243.07 ; P5.16@4020,7060 4020,6923.72 3866.28,6770 C18.2@3485.12,6770 ; v1(4460,6560.63) 4359.37,6460 ; S1.3@4610,7590 4795,7590 P1.3@4965,7420 ; C1.1@4751.93,4658.07 C1.1@4774.53,4658.07 4774.53,4620 4704.72,4550.19 ; 2563.94,6920 2592.8,6948.86 3473.18,6948.86 3485.12,6936.92 C18.2@3485.12,6770 ; C23.1@3372.6,6162.34 3372.6,6121 3399.31,6121 3410,6110.31 3495.49,6110.31 3495.49,6193.49 3520,6218 3667.5,6218 3682,6232.5 3747.5,6232.5 3773,6207 4048,6207 4097,6256 4097,6403 4040,6460 ; 3882.1,4550.19 4704.72,4550.19 ; 3882.1,4550.19 4704.72,4550.19 ; 4040,6460 v1(4155,6460) ; 4040,6460 v1(4155,6460) ; v1(4155,6460) 4359.37,6460 ; v1(4155,6460) 4359.37,6460 ; v1(4155,6460) 4359.37,6460
KEYPAD_C1: D8.2 P3.4 R20.2 U1.62 | length 6614.7
  Top Layer w10: U1.62@3297.95,6718.58 3297.95,6622.05 v1(3315,6605) ; v1(3315,7477) 3275,7437 3275,7040 v1(3414,6901) ; D8.2@4600,3753.07 4600,3673.06 4593.94,3667 P3.4@4593.94,3587.01 4557,3623.95 4557,3930 4600,3973 4701,3973 4795,4067 4795,6496 v1(4765,6526)
  Bottom Layer w10: v1(3315,6605) 3315,6802 v1(3414,6901) ; v1(3315,7477) 4220,7477 4765,6932 v1(4765,6526) ; P3.4@4593.94,3587.01 4593.94,3525.06 4600,3519 R20.2@4600,3457.4
KEYPAD_C2: D9.2 P3.3 R21.2 U1.61 | length 6064.3
  Top Layer w7: U1.61@3317.64,6718.58 3317.64,6791
  Top Layer w10: v1(2708,5819) 2725,5836 v1(2725,6896) ; v1(3283.64,6825) 3317.64,6791 ; P3.3@4693.94,3587.01 4693.94,3677 4700,3683.06 D9.2@4700,3773.07
  Bottom Layer w10: v1(2708,5819) 2260,5371 2260,5152.53 3766.53,3646 4634.95,3646 P3.3@4693.94,3587.01 4693.94,3525.06 4700,3519 R21.2@4700,3457.4 ; v1(2725,6896) 2745,6916 3192.64,6916 v1(3283.64,6825)